# Altium PCB receiver_v0_1.PcbDoc
Units mm, origin at the board's own origin, x right, y up, seen from the top; angles counter-clockwise.
Board outline 51.38 x 57.73 mm, 2 copper layers (Top Layer, Bottom Layer); 41 components, 35 nets, 114 pads, 0 vias.
Unrouted connection lines stored in the file: 53.
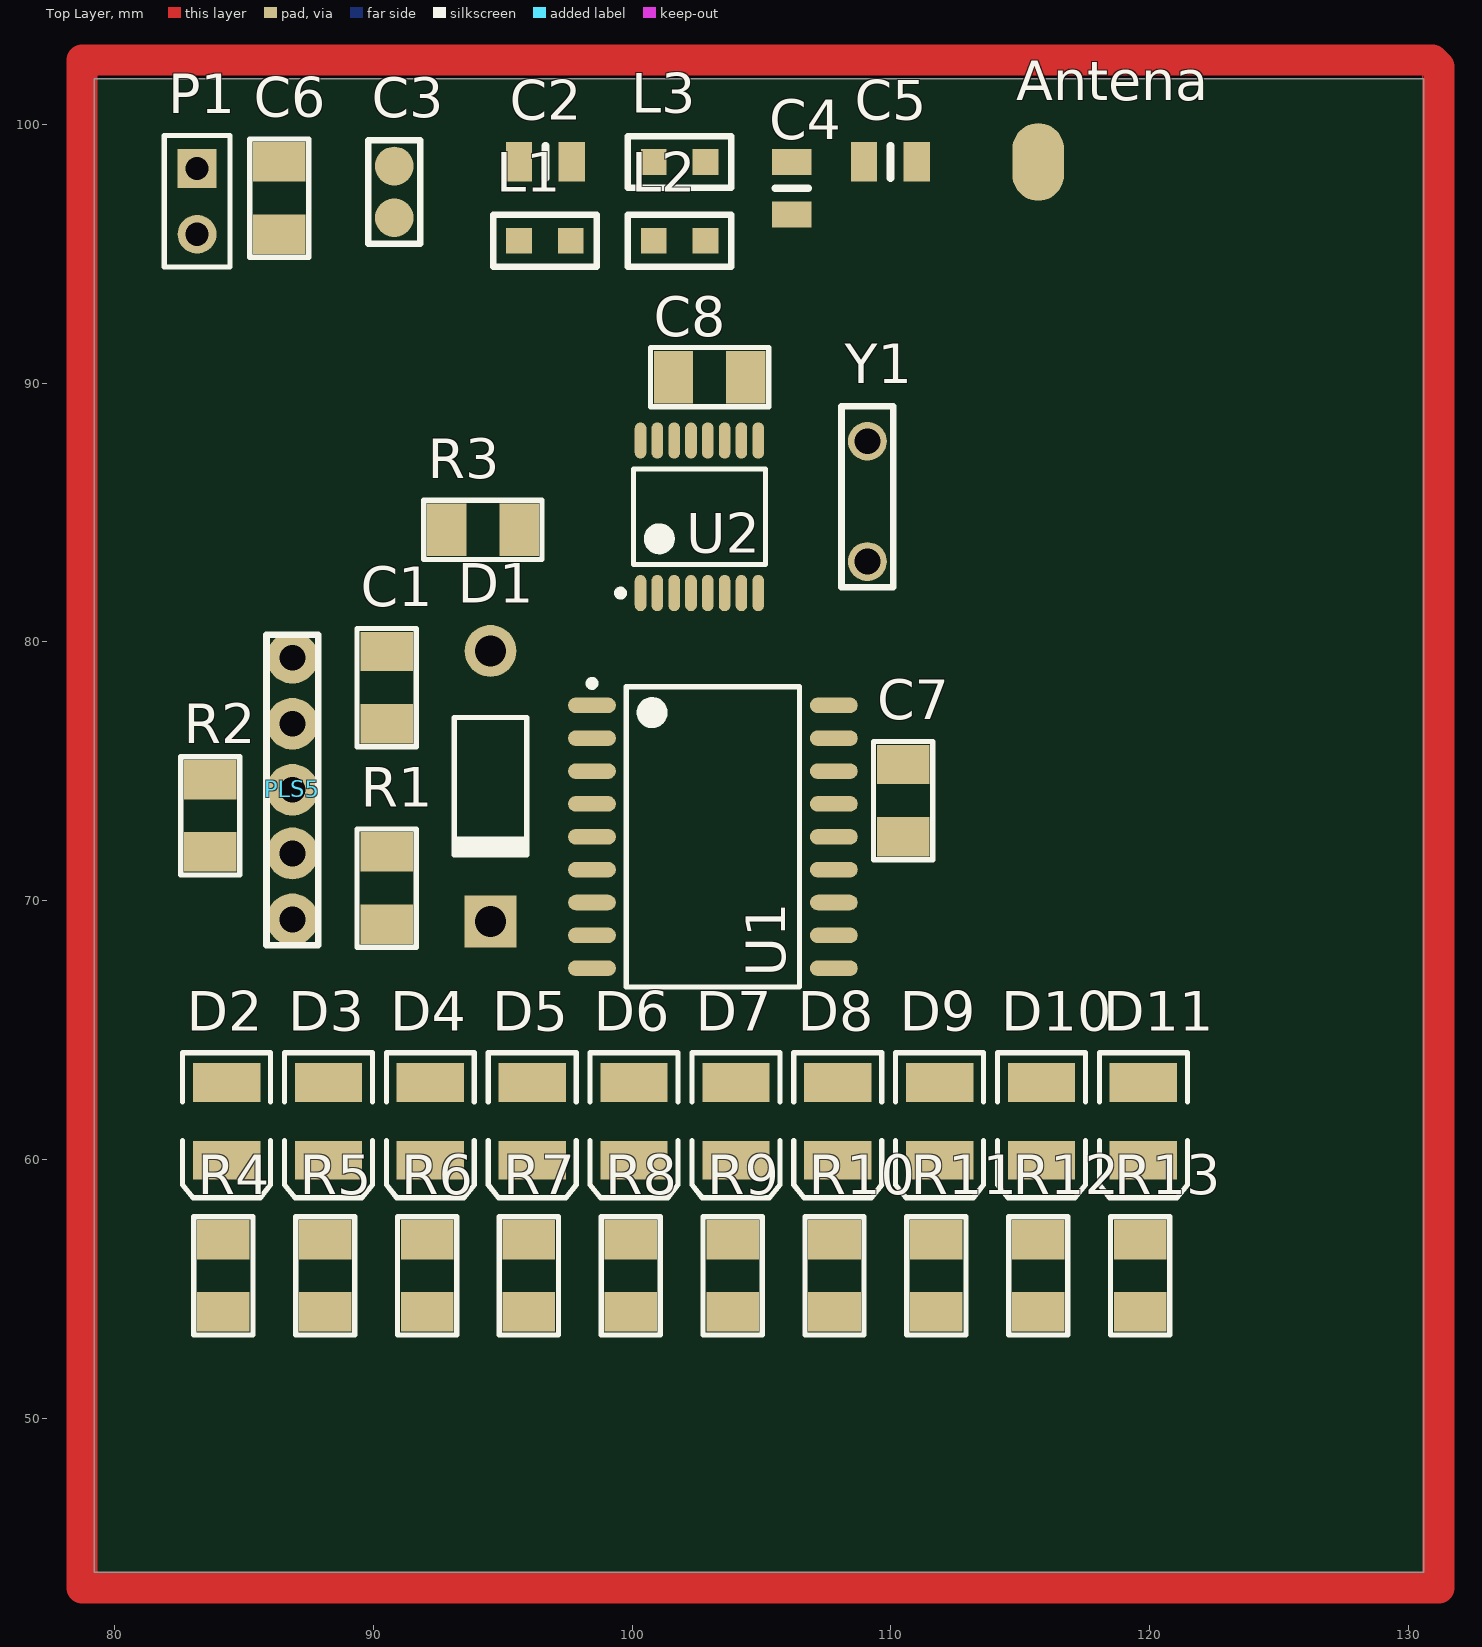
[diagram p0: Top Layer view]
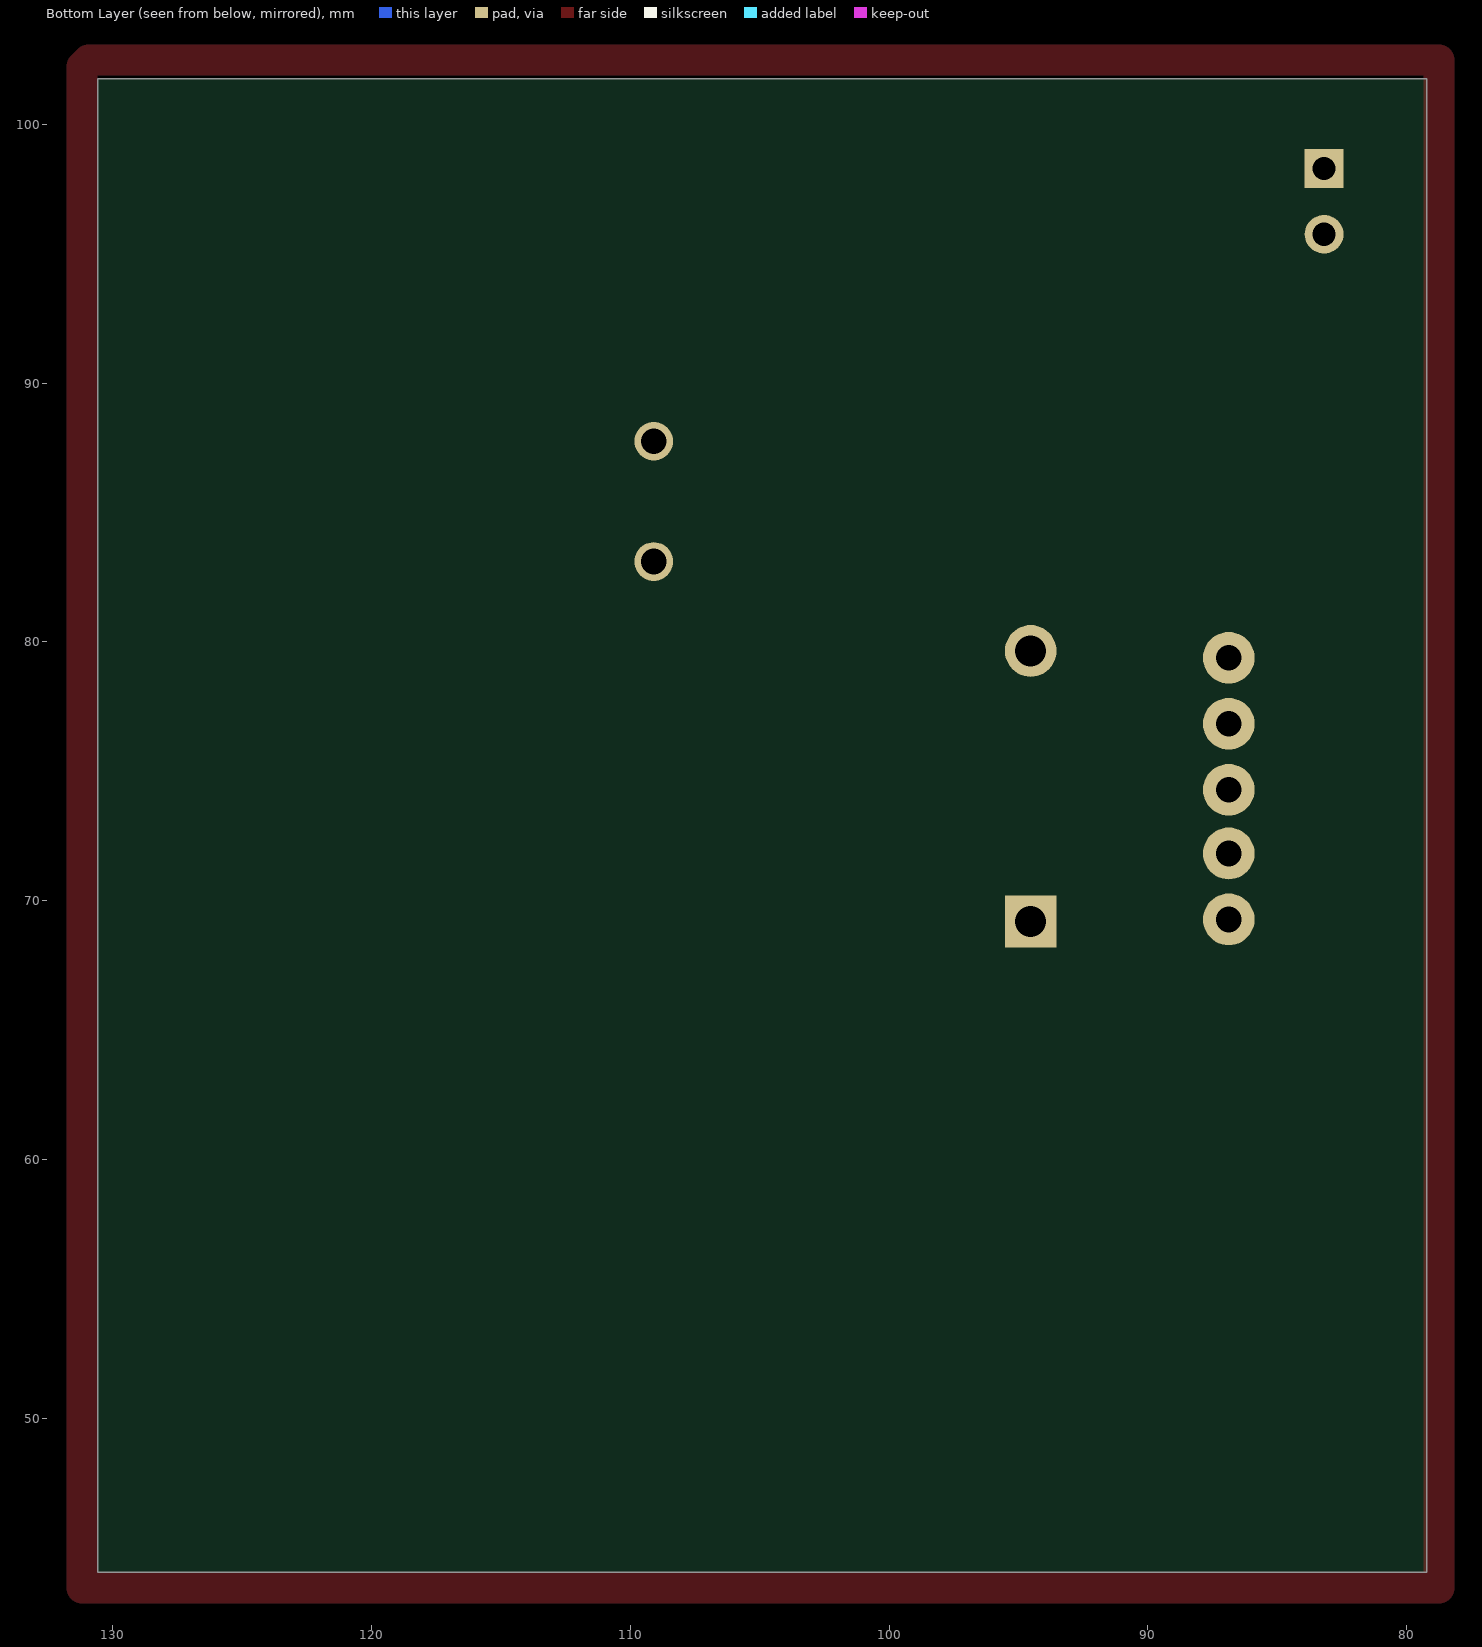
[diagram p1: Bottom Layer view, seen from below]

## Layer stack, top to bottom
Top Solder: solder mask 0.0102, Solder Resist, Dk 3.5
Top Layer: signal copper 0.0356
Dielectric 1: dielectric 0.32, FR-4, Dk 4.8
Bottom Layer: signal copper 0.0356
Bottom Solder: solder mask 0.0102, Solder Resist, Dk 3.5

## Board outline
79.213,44.034 79.213,101.762 130.591,101.762 130.591,44.034

## Design rules (kind name [scope] priority, off if disabled: settings)
Clearance [All] p1: gap=0.254
PolygonConnect [All] p1: connectstyle=Relief reliefconductorwidth=0.254 reliefentries=4 polygonreliefangle="90 Angle" airgapwidth=0.254
RoutingLayers [All] p1: top layer_v5=TRUE bottom layer_v5=FALSE
RoutingVias [All] p1: holewidth=0.711 width=1.27 viastyle="Through Hole" minholewidth=0.711 minwidth=1.27 maxholewidth=0.711 maxwidth=1.27
SolderMaskExpansion [All] p1: expansion=0.102
Width [All] p1: maxlimit=0.254 minlimit=0.254 preferedwidth=0.254
29 further rules are at their usual default settings.

## Components (designator, comment, footprint, x,y, rotation, side; value= is the part's Value field where it differs from the comment)
Antena "Antena" Anteny 115.697,98.552 r90 top
C1 "100pF" SMD-1206C 90.51,78.232 r180 top
C2 "4.7pF" SMD-0805C 96.647,98.552 r90 top
C3 "" Ñ0805 90.805,96.393 r90 top
C4 "4.7pF" SMD-0805C 106.172,97.536 r0 top
C5 "18pF" SMD-0805C 109.982,98.552 r90 top
C6 "100pF" SMD-1206C 86.36,97.155 r0 top
C7 "100pF" SMD-1206C 110.473,73.864 r180 top
C8 "100pF" SMD-1206C 102.997,90.235 r90 top
D1 "Diode 1N4001" DO-41 94.525,74.422 r270 top
D2 "LED3" 3.5X2.8X1.9 84.328,61.468 r270 top
D3 "LED3" 3.5X2.8X1.9 88.265,61.468 r270 top
D4 "LED3" 3.5X2.8X1.9 92.202,61.468 r270 top
D5 "LED3" 3.5X2.8X1.9 96.139,61.468 r270 top
D6 "LED3" 3.5X2.8X1.9 100.076,61.468 r270 top
D7 "LED3" 3.5X2.8X1.9 104.013,61.468 r270 top
D8 "LED3" 3.5X2.8X1.9 107.95,61.468 r270 top
D9 "LED3" 3.5X2.8X1.9 111.887,61.468 r270 top
D10 "LED3" 3.5X2.8X1.9 115.824,61.468 r270 top
D11 "LED3" 3.5X2.8X1.9 119.761,61.468 r270 top
L1 "" L? 95.631,95.504 r0 top
L2 "" L? 100.838,95.504 r0 top
L3 "" L? 100.838,98.552 r0 top
P1 "BAT" HDR1X2 83.185,98.298 r270 top
PLS5 "PLS5" PLS5 86.868,69.275 r90 top
R1 "10k" SMD-1206-RES 90.51,70.485 r0 top
R2 "10k" SMD-1206-RES 83.693,73.279 r0 top
R3 "10k" SMD-1206-RES 94.234,84.328 r270 top
R4 "10k" SMD-1206-RES 84.201,55.499 r180 top
R5 "10k" SMD-1206-RES 88.138,55.499 r180 top
R6 "10k" SMD-1206-RES 92.075,55.499 r180 top
R7 "10k" SMD-1206-RES 96.012,55.499 r180 top
R8 "10k" SMD-1206-RES 99.949,55.499 r180 top
R9 "10k" SMD-1206-RES 103.886,55.499 r180 top
R10 "10k" SMD-1206-RES 107.823,55.499 r180 top
R11 "10k" SMD-1206-RES 111.76,55.499 r180 top
R12 "10k" SMD-1206-RES 115.697,55.499 r180 top
R13 "10k" SMD-1206-RES 119.634,55.499 r180 top
U1 "PIC16F627A" PIC16F627A 103.124,72.467 r0 top
U2 "MRF49XA" MRF49XA 102.601,84.836 r90 top
Y1 "Y1" Quartz 109.093,83.107 r90 top

## Footprints (in the part's own frame and the unit in brackets; to place one, negate y for a bottom-side part, rotate by r counter-clockwise, add the part's x,y. Pads: shape width x height; smd on the part's side, far side on the other; paste and mask are expansions set on the pad)
3.5X2.8X1.9 [mm] "SM LED; 2 C-Bend Leads; Body 3.5 x 2.8 x 1.9 mm, inc leads (LxWxH typ)"
  rect 1.5x2.6 smd: 1(-1.5,0) 2(1.5,0)
  silkscreen extent -2.65,-1.7 2.95,1.7
Anteny [mm]
  oval 3x2 smd: 1(0,0)
DO-41 [mm] "Diode, Axial; Body 5.2 x 2.7 mm (LxDia. max), Lead Dia. 0.86 mm (max)"
  round 2 hole 1.2: 1(-5.23,0)
  rect 2x2 hole 1.2: 2(5.23,0)
  silkscreen extent -2.65,-1.4 2.75,1.4
HDR1X2 [mm] "Connector; Header; 2 Position"
  rect 1.5x1.5 hole 0.9: 1(0,0)
  round 1.5 hole 0.9: 2(2.54,0)
  silkscreen extent -1.27,-1.27 3.81,1.27
L? [mm]
  rect 1x1 smd: 1(0,0) 2(2,0)
  silkscreen extent -1,-1 3,1
MRF49XA [mm]
  oval 1.4x0.45 smd: 1(-2.95,2.275) 2(-2.95,1.625) 3(-2.95,0.975) 4(-2.95,0.325) 5(-2.95,-0.325) 6(-2.95,-0.975) 7(-2.95,-1.625) 8(-2.95,-2.275) 9(2.95,-2.275) 10(2.95,-1.625) 11(2.95,-0.975) 12(2.95,-0.325) 13(2.95,0.325) 14(2.95,0.975) 15(2.95,1.625) 16(2.95,2.275)
  silkscreen extent -3.07,-2.55 1.85,3.17, body extent -2.25,-2.55 2.25,2.55, height 1.2
PIC16F627A [mm]
  oval 1.85x0.6 smd: 1(-4.675,5.08) 2(-4.675,3.81) 3(-4.675,2.54) 4(-4.675,1.27) 5(-4.675,0) 6(-4.675,-1.27) 7(-4.675,-2.54) 8(-4.675,-3.81) 9(-4.675,-5.08) 10(4.675,-5.08) 11(4.675,-3.81) 12(4.675,-2.54) 13(4.675,-1.27) 14(4.675,0) 15(4.675,1.27) 16(4.675,2.54) 17(4.675,3.81) 18(4.675,5.08)
  silkscreen extent -4.8,-5.8 3.35,6.05, body extent -3.75,-5.8 3.75,5.8, height 2.05
PLS5 [mm]
  round 2 hole 1: 1(0,0) 2(2.55,0) 3(5.01,0) 4(7.56,0) 5(10.11,0)
  silkscreen extent -1,-1 11,1
Quartz [mm]
  round 1.5 hole 1: 1(0,0) 2(4.65,0)
  silkscreen extent -1,-1 6,1
SMD-0805C [mil]
  rect 60x40 smd: 1(0,40) 2(0,-40)
  silkscreen extent -25,0 25,0, body extent -25,-39 25,39, height 35
SMD-1206-RES [mil]
  rect 80x60 smd: 1(0,55) 2(0,-55)
  silkscreen extent -45,-90 45,90, body extent -34,-66 34,66, height 33
SMD-1206C [mil]
  rect 80x60 smd: 1(0,55) 2(0,-55)
  silkscreen extent -45,-90 45,90, body extent -31,-63 32,63, height 39
Ñ0805 [mm]
  round 1.5 smd: 1(0,0) 2(2,0)
  silkscreen extent -1,-1 3,1

## Part data
C1 C6 C7 C8: library part GCM31A7U2J101JX01D, "CAP CER 100PF 630V U2J 1206"
C2 C4: library part GQM2195C2A4R7BB01D, "CAP CER 4.7PF 100V NP0 0805"
C3: library part Capacity
C5: library part GQM2195C2A180JB01D, "CAP CER 18PF 100V NP0 0805"
D1: "1 Amp General Purpose Rectifier"
D2 D3 D4 D5 D6 D7 D8 D9 D10 D11: "Typical BLUE SiC LED"
L1 L2 L3: library part Inductance
P1: library part "Header 2", "Header, 2-Pin"
R1 R2 R3 R4 R5 R6 R7 R8 R9 R10 R11 R12 R13: library part ERJ-P08J103V, "RES SMD 10K OHM 5% 2/3W 1206"
Y1: library part Quartz

## Nets (pads, with @x,y where several pads share a name; then routed paths per layer and width w, separated by ;. In a path a pad name is that pad's centre, name@x,y a point inside that pad or via, vN(x,y) a via of type N, cw(c..) or ccw(c..) an arc to the next point about the centre after c; other vN are vias at no path point)
CS: U1.17 U2.3
FSK: U1.18 U2.6
GND: C1.1 C3.1 C6.2 C7.2 C8.2 P1.2 PLS5.3 R4.1 R5.1 R6.1 R7.1 R8.1 R9.1 R10.1 R11.1 R12.1 R13.1 U1.5 U2.11 Y1.1
"MCLR VPP": D1.2 R3.1 U1.4
NetAntena_1: Antena.1 C5.2
NetC1_2: C1.2 D1.1 R1.1
NetC2_2: C2.2 L1.2 L2.1 L3.1 U2.13
NetC4_1: C4.1 C5.1 L3.2
NetC4_2: C4.2 L2.2 U2.12
NetD2_1: D2.1 U1.6
NetD2_2: D2.2 R4.2
NetD3_1: D3.1 U1.7
NetD3_2: D3.2 R5.2
NetD4_1: D4.1 U1.8
NetD4_2: D4.2 R6.2
NetD5_1: D5.1 U1.9
NetD5_2: D5.2 R7.2
NetD6_1: D6.1 U1.10
NetD6_2: D6.2 R8.2
NetD7_1: D7.1 U1.11
NetD7_2: D7.2 R9.2
NetD8_2: D8.2 R10.2
NetD9_2: D9.2 R11.2
NetD10_1: D10.1 U1.15
NetD10_2: D10.2 R12.2
NetD11_1: D11.1 U1.16
NetD11_2: D11.2 R13.2
NetPLS5_1: PLS5.1 R1.2
NetPLS5_2: PLS5.2 R2.2
NetU2_9: U2.9 Y1.2
RB6: D8.1 PLS5.5 U1.12
RB7: D9.1 PLS5.4 U1.13
SCK: U1.2 U2.2
SDI: U1.1 U2.1
VCC: C2.1 C3.2 C6.1 C7.1 C8.1 L1.1 P1.1 R2.1 R3.2 U1.14 U2.14
pads on no net: U1.3 U2.4 U2.5 U2.7 U2.8 U2.10 U2.15 U2.16
copper on no net: | length 281.5
  Top Layer w0.254: 131.191,43.561 131.191,102.235
  Top Layer w1.2: 78.74,43.434 78.74,102.489 130.937,102.489 131.191,102.235 131.191,43.434 78.74,43.434

## Polygon pours and split planes (outlines as drawn)
GND on Top Layer "Top Layer-No Net" (solid, remove dead copper, shelved, pour order 6): 130.556,43.815 130.556,102.108 130.683,102.235 78.74,102.235 78.74,44.069 79.121,43.688

## Silkscreen, mask and mechanical layers (free items; w line width, h text height)
Mechanical 1:
  lines w1.2: 78.613,43.434 78.613,102.362 131.191,102.362 131.191,43.434 78.613,43.434